# Altium PCB УШЯИ 758725.634.PcbDoc (part 1 of 2)
Units mm, origin at the board's own origin, x right, y up, seen from the top; angles counter-clockwise.
Board outline 220 x 115 mm, 2 copper layers (Top Layer, Top, Bottom Layer, Bottom), stack 1.571 mm thick; 229 components, 122 nets, 707 pads, 215 vias.
Unrouted connection lines stored in the file: 1.
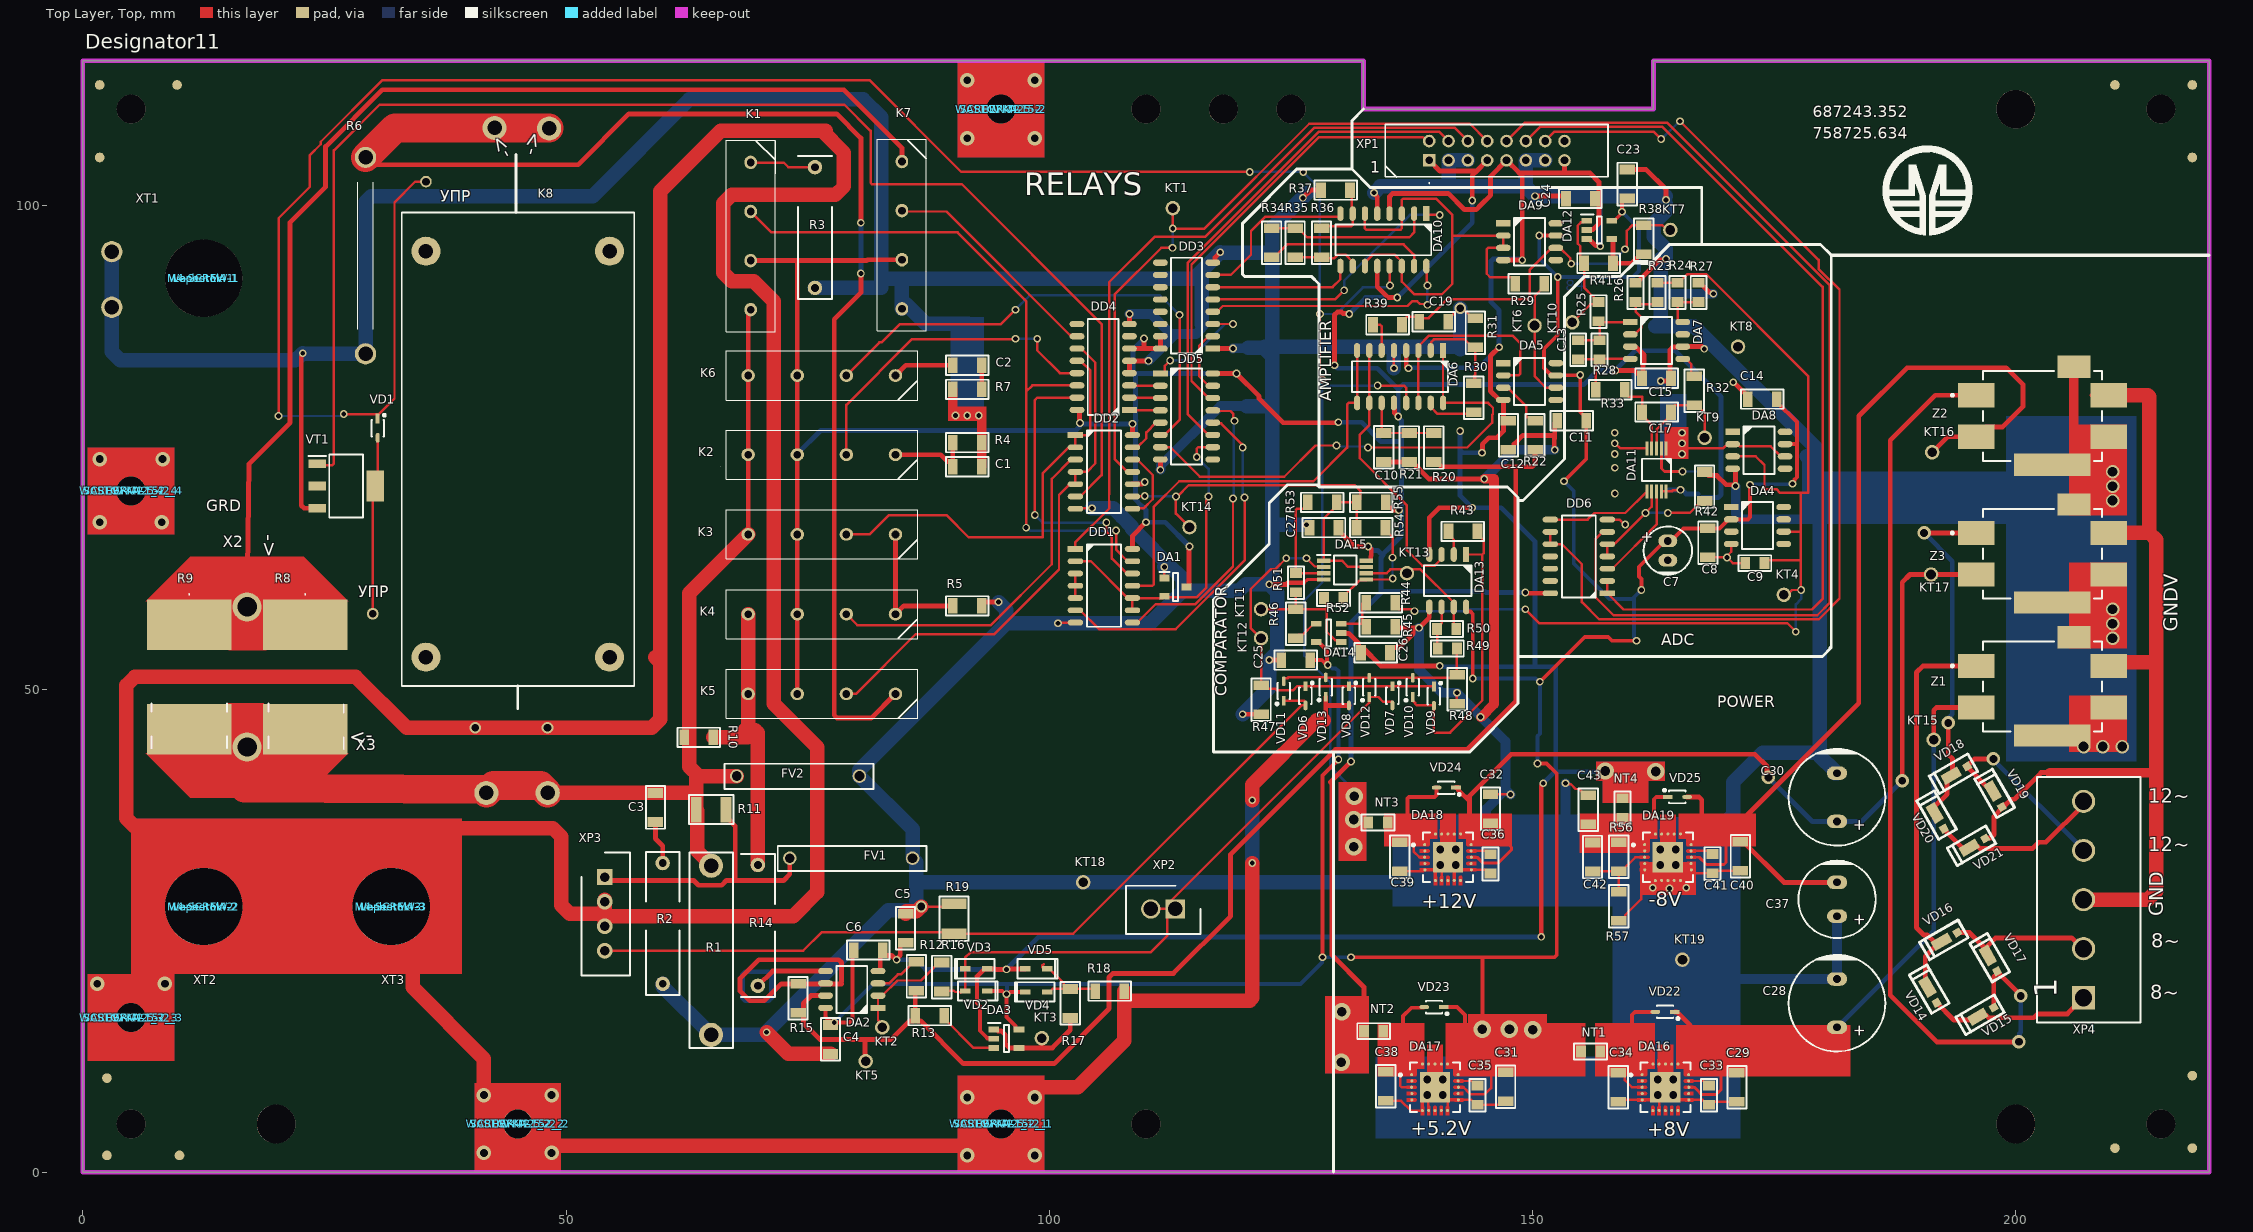
[diagram p0: Top Layer, Top view]
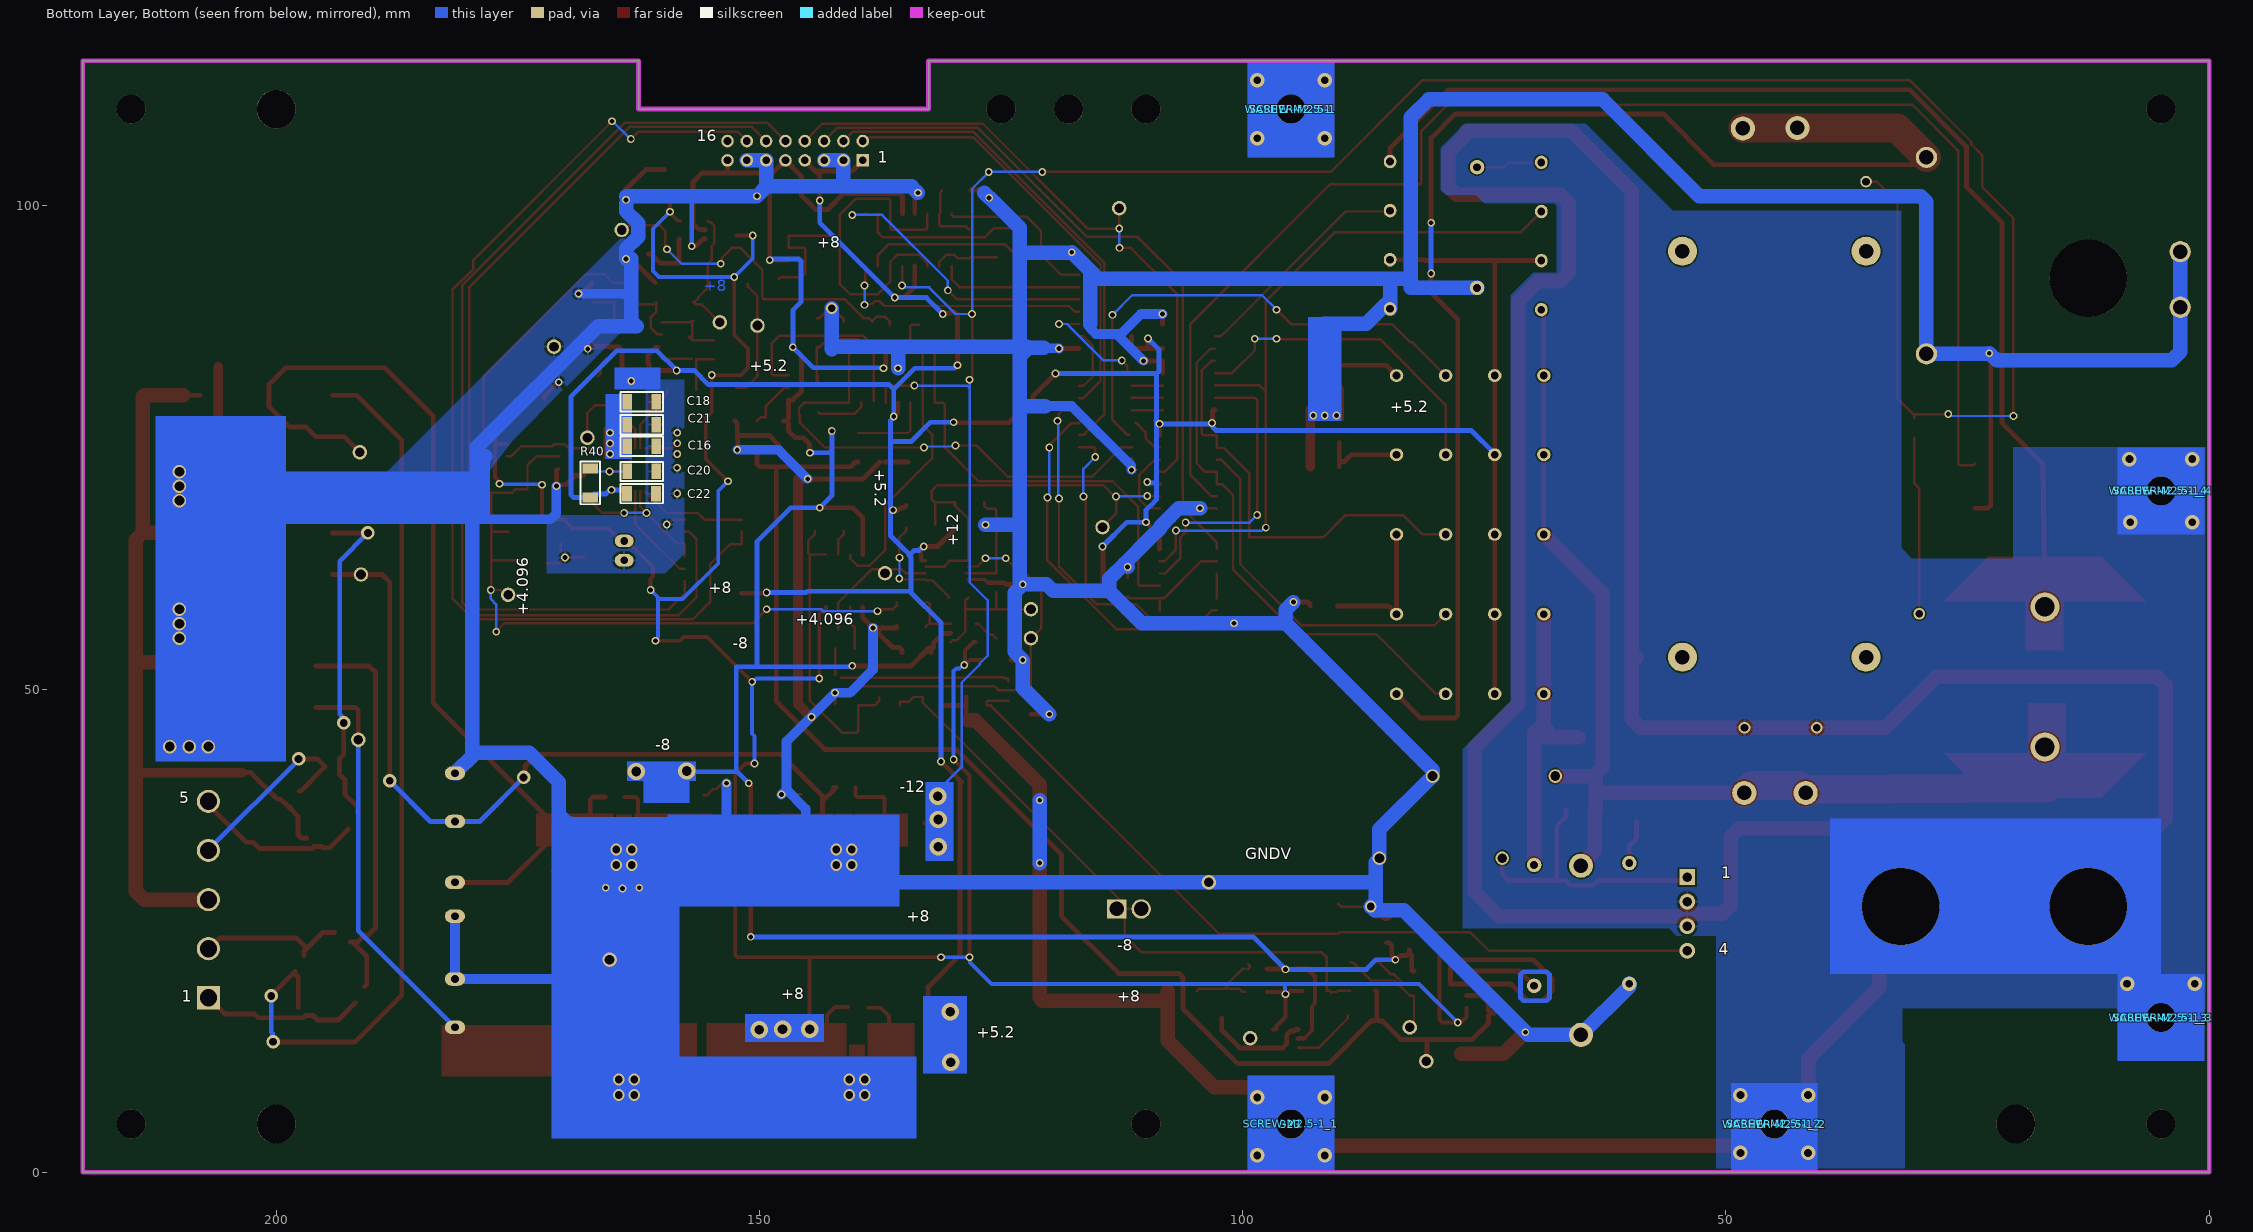
[diagram p1: Bottom Layer, Bottom view, seen from below]
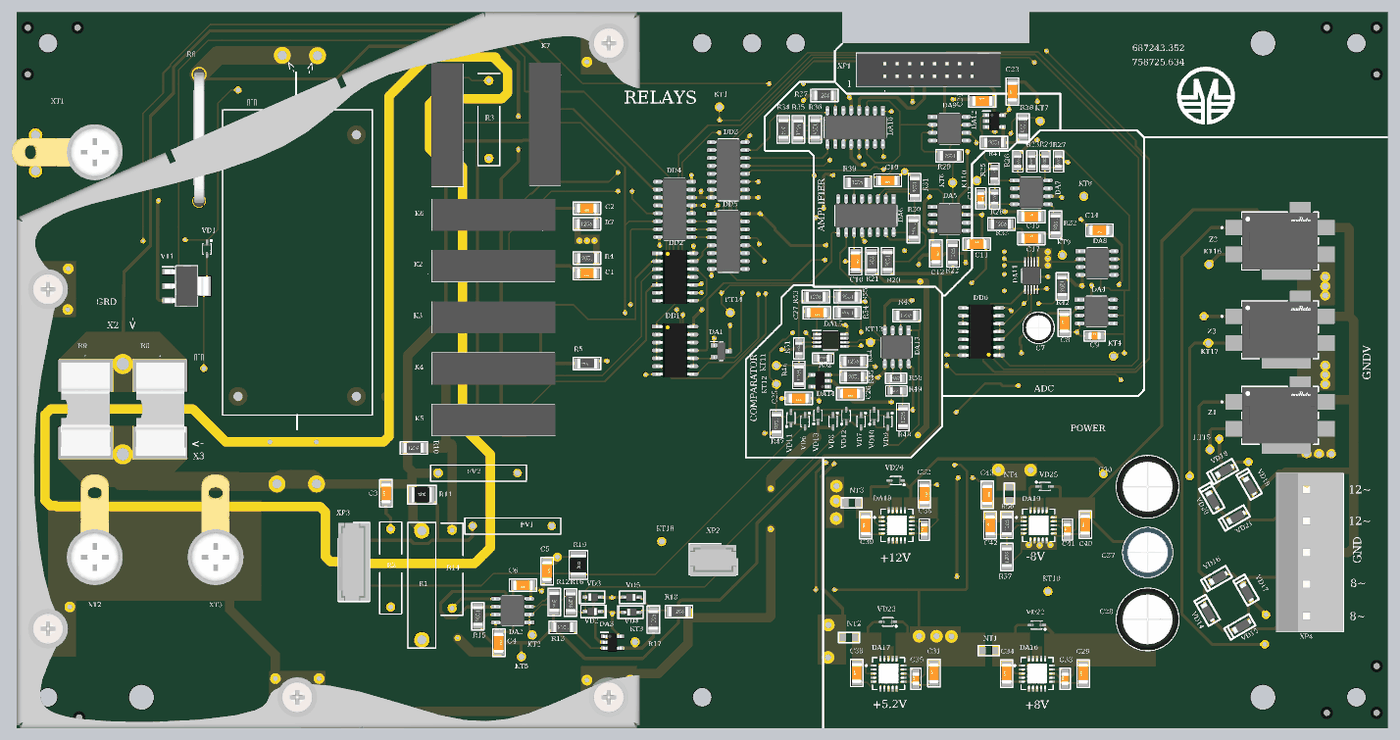
[diagram p3: 3D render of the assembled board from above, using the file's embedded part models]
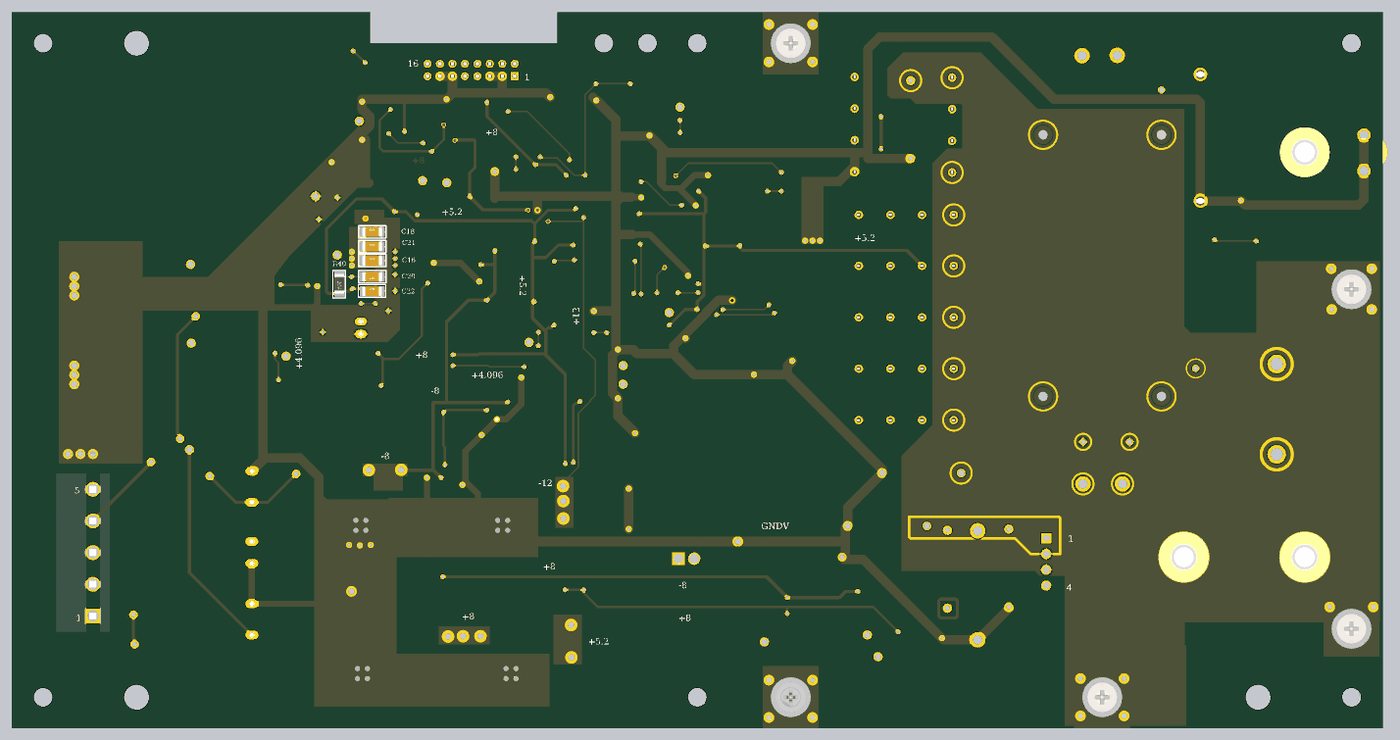
[diagram p4: 3D render of the assembled board from below, using the file's embedded part models]

## Layer stack, top to bottom
Top Solder, Top Mask: solder mask 0.0102, Solder Resist, Dk 3.5
Top Layer, Top: signal copper 0.0356
Dielectric 1: core 1.5, FR-4, Dk 4.8
Bottom Layer, Bottom: signal copper 0.0356
Bottom Solder, Bot Mask: solder mask 0.0102, Solder Resist, Dk 3.5

## Board outline
132.5,110 132.5,115 0,115 0,0 220,0 220,115 162.5,115 162.5,110

## Design rules (kind name [scope] priority, off if disabled: settings)
Clearance [All] p1: gap=0.15 ignorepadtopadclearanceinfootprint=FALSE except(0.2: Arc-Via Track-Via)
HoleSize [All] p1: absolutevalues=TRUE maxlimit=8 minlimit=0.25 maxpercent=80.000 minpercent=20.000
HoleToHoleClearance [All] p1: gap=0.2 allowstackedmicrovias=TRUE
MinimumSolderMaskSliver [All] p1: minsoldermaskwidth=0.001
NetAntennae [All] p1: netantennaetolerance=2
PlaneClearance [All] p1: clearance=0.254
PolygonConnect [All] p1: connectstyle=Relief reliefconductorwidth=0.254 reliefentries=4 polygonreliefangle="90 Angle" airgapwidth=0.254
RoutingVias [All] p1: holewidth=0.5 width=0.8 viastyle="Through Hole" minholewidth=0.5 minwidth=0.8 maxholewidth=0.5 maxwidth=2
ShortCircuit [All] p1: allowed=TRUE
SilkToSilkClearance [All] p1: silktosilkclearance=0.1
SilkToSolderMaskClearance [IsPad] p1: minsilkscreentomaskgap=0.1 clearancetoexposedcopper=TRUE
SolderMaskExpansion [All] p1: expansion=0.102 istentingtop=FALSE
UnConnectedPin [All] p1:
UnRoutedNet [All] p1: checkbadconnections=TRUE
Width [All] p1: maxlimit=5 minlimit=0.15 preferedwidth=0.3 minimp=50.000000 maximp=50.000000 favimp=50.000000
21 further rules are at their usual default settings.

## Classes and differential pairs
component class Switches: C1 C2 C3 C4 C5 C6 DA1 DA2 DA3 DD1 DD2 DD3 DD4 DD5 FV1 FV2 K1 K2 K3 K4 K5 K6 K7 K8 R1 R2 R3 R4 R5 R6 R7 R8 R9 R10 R11 R12 R13 R14 R15 R16 R17 R18 R19 S1 S2 VD1 VD2 VD3 VD4 VD5 VT1 X1 X2 X3 XP1 XP2 XP3 XP? XT1 XT2 XT3
component class PowerSupply: C28 C29 C30 C31 C32 C33 C34 C35 C36 C37 C38 C39 C40 C41 C42 C43 DA16 DA17 DA18 DA19 KT6 KT11 KT13 KT18 KT19 NT1 NT2 NT3 NT4 R56 R57 VD14 VD15 VD16 VD17 VD18 VD19 VD20 VD21 VD22 VD23 VD24 VD25 XP4 Z1 Z2 Z3
component class Comparator: C25 C26 C27 DA13 DA14 DA15 KT6 KT11 KT13 R43 R44 R45 R46 R47 R48 R49 R50 R51 R52 R53 R54 R55 VD6 VD7 VD8 VD9 VD10 VD11 VD12 VD13
component class Amplifier: C7 C8 C9 C10 C11 C12 C13 C14 C15 C16 C17 C18 C19 C20 C21 C22 C23 C24 DA4 DA5 DA6 DA7 DA8 DA9 DA10 DA11 DA12 DD6 KT4 KT5 KT6 R20 R21 R22 R23 R24 R25 R26 R27 R28 R29 R31 R32 R33 R34 R35 R36 R37 R38 R39 R40 R41 R42

## Components (designator, comment, footprint, x,y, rotation, side; value= is the part's Value field where it differs from the comment)
323 "Comment" WASHER-M2.5 95,5 r180 bottom
C1 "1206-XP7-630 B-3,3 нФ+-10%" "CAP: 1206" 91.5,73 r180 top value="3,3 нФ"
C2 "1206-XP7-500 B-15 нФ+-10%" "CAP: 1206" 91.5,83.5 r180 top value="15 нФ"
C3 "1206-NP0-500 B-270 пФ+-5%" "CAP: 1206" 59.25,37.75 r90 top value="22 пФ"
C4 "1206-X7R-50 B-0,1 мкФ+-10%" "CAP: 1206" 77.358,13.75 r270 top value="0,1 мкФ"
C5 "1206-X7R-50 B-0,1 мкФ+-10%" "CAP: 1206" 85.12,25.25 r270 top value="0,1 мкФ"
C6 "1206-X7R-50 B-0,1 мкФ+-10%" "CAP: 1206" 81.25,23 r180 top value="0,1 мкФ"
C7 "JRB-50В-4,7мкФ" "CAP TH ALUM ELEC D5.00mm S2.00mm H11.00mm" 163.991,64.322 r90 top
C8 "1206-X7R-50 B-0,1 мкФ+-10%" "CAP: 1206" 168.135,65.122 r90 top value="0,1 мкФ"
C9 "0805-X7R-25 В-0,1 мкФ +-10%" "CAP: 0805" 172.991,63.022 r0 top value="0,1 мкФ"
C10 "1206-X7R-50 B-0,01 мкФ+-10%" "CAP: 1206" 134.607,75 r270 top value="0,01 мкФ"
C11 "1206-X7R-50 B-0,1 мкФ+-10%" "CAP: 1206" 154.048,77.75 r0 top value="0,1 мкФ"
C12 "1206-X7R-50 B-0,1 мкФ+-10%" "CAP: 1206" 147.5,76.25 r270 top value="0,1 мкФ"
C13 "0805-C0G-50 В-240 пФ +-5%" "CAP: 0805" 154.72,85.102 r270 top value="10 пФ"
C14 "1206-X7R-50 B-0,1 мкФ+-10%" "CAP: 1206" 173.75,80 r180 top value="0,1 мкФ"
C15 "1206-X7R-50 B-0,1 мкФ+-10%" "CAP: 1206" 162.82,82.162 r0 top value="0,1 мкФ"
C16 "1206-X7R-10 B-10 мкФ+-10%" "CAP: 1206" 162.17,75.127 r180 bottom value="10 мкФ"
C17 "1206-X7R-50 B-0,01 мкФ+-10%" "CAP: 1206" 162.82,78.662 r0 top value="0,01 мкФ"
C18 "1206-X7R-50 B-2,2 мкФ+-10%" "CAP: 1206" 162.17,79.722 r180 bottom value="2,2 мкФ"
C19 "1206-X7R-50 B-0,01 мкФ+-10%" "CAP: 1206" 139.784,87.996 r180 top value="0,01 мкФ"
C20 "1206-X7R-50 B-2,2 мкФ+-10%" "CAP: 1206" 162.17,72.511 r0 bottom value="2,2 мкФ"
C21 "1206-X7R-50 B-2,2 мкФ+-10%" "CAP: 1206" 162.17,77.349 r180 bottom value="2,2 мкФ"
C22 "1206-X7R-50 B-0,33 мкФ+-10%" "CAP: 1206" 162.191,70.222 r180 bottom value="0,33 мкФ"
C23 "1206-X7R-50 B-0,1 мкФ+-10%" "CAP: 1206" 159.8,102.25 r90 top value="0,1 мкФ"
C24 "1206-X7R-50 B-0,1 мкФ+-10%" "CAP: 1206" 154.947,100.75 r0 top value="0,1 мкФ"
C25 "1206-X7R-50 B-0,1 мкФ+-10%" "CAP: 1206" 125.5,53 r180 top value="0,1 мкФ"
C26 "1206-X7R-50 B-0,1 мкФ+-10%" "CAP: 1206" 133.75,53.75 r180 top value="0,1 мкФ"
C27 "1206-X7R-50 B-0,1 мкФ+-10%" "CAP: 1206" 128.412,66.709 r180 top value="0,1 мкФ"
C28 "JRB-25В-1000 мкФ" "CAP TH ALUM ELEC D10.00mm S5.00mm H21.00mm" 181.493,17.5 r270 top
C29 "1206-X7R-50 B-10 мкФ+-10%" "CAP: 1206" 171.143,8.8 r90 top value="10 мкФ"
C30 "JRB-35В-470мкФ" "CAP TH ALUM ELEC D10.00mm S5.00mm H17.00mm" 181.493,38.8 r270 top
C31 "1206-X7R-50 B-10 мкФ+-10%" "CAP: 1206" 147.2,8.867 r90 top value="10 мкФ"
C32 "1206-X7R-50 B-10 мкФ+-10%" "CAP: 1206" 145.643,37.6 r270 top value="10 мкФ"
C33 "0805-X7R-25 В-1 мкФ +-10%" "CAP: 0805" 168.243,7.975 r90 top value="1 мкФ"
C34 "1206-X7R-25 B-47мкФ+-10%" "CAP: 1206" 158.86,8.8 r90 top value="51 пФ"
C35 "0805-X7R-25 В-1 мкФ +-10%" "CAP: 0805" 144.3,7.975 r90 top value="1 мкФ"
C36 "0805-X7R-25 В-1 мкФ +-10%" "CAP: 0805" 145.643,31.915 r90 top value="1 мкФ"
C37 "JRB-25В-220мкФ" "CAP TH ALPOLY D8.00mm S3.50mm H12.00mm" 181.5,28.25 r270 top
C38 "1206-X7R-25 B-47мкФ+-10%" "CAP: 1206" 134.8,8.899 r90 top value="51 пФ"
C39 "1206-X7R-25 B-47мкФ+-10%" "CAP: 1206" 136.243,32.635 r90 top value="51 пФ"
C40 "1206-X7R-50 B-10 мкФ+-10%" "CAP: 1206" 171.5,32.711 r90 top value="10 мкФ"
C41 "0805-X7R-25 В-1 мкФ +-10%" "CAP: 0805" 168.6,31.933 r90 top value="1 мкФ"
C42 "1206-X7R-50 B-0,01 мкФ+-10%" "CAP: 1206" 156.2,32.625 r90 top value="0,01 мкФ"
C43 "1206-X7R-25 B-47мкФ+-10%" "CAP: 1206" 155.75,37.5 r270 top value="51 пФ"
DA1 "MAX809S" SOT-23-3 111.9,61.5 r0 top
DA2 "TLV9152IDR" 8-SOIC 79.562,18.915 r180 top
DA3 "TLV9151IDR" SOT-23-5 95.565,13.827 r0 top
DA4 "ADR434BR" 8-SOIC 173.266,66.922 r0 top
DA5 "ADA4637-1ARZ" 8-SOIC 149.687,81.817 r0 top
DA6 "ADG433BR" 16-SOIC 136.284,82.317 r270 top
DA7 "ADA4941-1YRZ" 8-SOIC 162.82,86.062 r0 top
DA8 "AD8031BRZ" 8-SOIC 173.408,74.707 r0 top
DA9 "ADA4637-1ARZ" 8-SOIC 149.687,96.28 r0 top
DA10 "ADG431BR" 16-SOIC 134.559,96.48 r270 top
DA11 "AD7691BRM" 10-MSOP 162.82,72.677 r270 top
DA12 "TLV9151IDR" SOT-23-5 156.9,97.5 r0 top
DA13 "TLV9152IDR" 8-SOIC 141.212,61.209 r270 top
DA14 "TLV9151IDR" SOT-23-5 128.912,55.809 r180 top
DA15 "TLV1842" 8-VSSOP 130.612,62.309 r0 top
DA16 "TPS7A4701" 20-VQFN 163.743,8.8 r0 top
DA17 "TPS7A4701" 20-VQFN 139.9,8.8 r0 top
DA18 "TPS7A4701" 20-VQFN 141.243,32.6 r0 top
DA19 "TPS7A3301" 20-VQFN 164,32.6 r0 top
DD1 "IN74HC00AD" 14-soic 102.7,64.497 r0 top
DD2 "IN74HC08AD" 14-SOIC 102.7,76.279 r0 top
DD3 "IN74HC139AD" 16-SOIC 114.2,89.674 r180 top
DD4 "IN74HC138AD" 16-SOIC 105.575,83.323 r180 top
DD5 "IN74HC595AD" 16-SOIC 114.2,78.2 r0 top
DD6 "IN74HC08AD" 14-SOIC 157.735,59.912 r180 top
Designator11 "Comment" Ekran 95,5 r90 top
FV1 "2027-09-B19" 2027-09-B19 79.5,32.5 r180 top
FV2 "2027-09-B19" 2027-09-B19 74,41 r180 top
K1 "SIL05-1A72-71L" SIL051A7271L 69.1,104.49 r270 top
K2 "SIL05-1A72-71L" SIL051A7271L 84.08,74.25 r180 top
K3 "SIL05-1A72-71L" SIL051A7271L 84.08,66 r180 top
K4 "SIL05-1A72-71L" SIL051A7271L 84.08,57.75 r180 top
K5 "SIL05-1A72-71L" SIL051A7271L 84.08,49.5 r180 top
K6 "SIL05-1A72-71L" SIL051A7271L 84.08,82.438 r180 top
K7 "SIL05-1A72-71L" SIL051A7271L 84.75,104.58 r270 top
K8 "УШЯИ.685442.092vs2Rel" УШЯИ.685442.092vs2Rel 45,50.3 r90 top
KT1 "OTV10" OTV10 112.769,99.75 r0 top
KT2 "OTV10" OTV10 82.711,15 r0 top
KT3 "OTV10" OTV10 99.222,13.877 r0 top
KT4 "OTV10" OTV10 176,59.75 r0 top
KT5 "OTV10" OTV10 81,11.5 r0 top
KT6 "OTV10" OTV10 150.2,87.608 r0 top
KT7 "OTV10" OTV10 164.25,97.5 r0 top
KT8 "OTV10" OTV10 171.25,85.427 r0 top
KT9 "OTV10" OTV10 167.791,76 r0 top
KT10 "OTV10" OTV10 154.095,87.936 r0 top
KT11 "OTV10" OTV10 121.904,58.259 r0 top
KT12 "OTV10" OTV10 121.904,55.259 r0 top
KT13 "OTV10" OTV10 137,61.984 r0 top
KT14 "OTV10" OTV10 114.5,66.75 r0 top
KT15 "OTV10" OTV10 191.5,44.75 r0 top
KT16 "OTV10" OTV10 191.336,74.5 r0 top
KT17 "OTV10" OTV10 191.22,61.85 r0 top
KT18 "OTV10" OTV10 103.5,30 r0 top
KT19 "OTV10" OTV10 165.5,22 r0 top
Lepestok-1 "Comment" Lepestok 12.5,92.5 r180 top locked
Lepestok-2 "Comment" Lepestok 12.5,27.5 r90 top locked
Lepestok-3 "Comment" Lepestok 31.9,27.5 r90 top locked
M4-SCREW-1 "Comment" M4-10SCREW 12.5,92.5 r0 top
M4-SCREW-2 "Comment" M4-10SCREW 12.5,27.5 r0 top
M4-SCREW-3 "Comment" M4-10SCREW 31.9,27.5 r0 top
NT1 "NetTie" NetTie 157,12.5 r180 top net-tie
NT2 "NetTie" NetTie 134.557,14.6 r180 top net-tie
NT3 "NetTie" NetTie 135,36.2 r180 top net-tie
NT4 "NetTie" NetTie 159.3,36.7 r90 top net-tie
R1 "С2-29В-0,25-4,99 МОм +-0.1%" С2-29В-0,25(140.02.0204.00.00) 65,22.97 r90 top
R2 "С2-29В-0,125-22 Ом +-0.1%-1,0-А" С2-29В-0,125(140.02.0202.00.00) 60,25.75 r90 top
R3 "С2-29В-0,125-49,9 кОм +-0.1%-1,0-А" С2-29В-0,125(140.02.0202.00.00) 75.75,97.75 r90 top
R4 "1206-499 Ом+-0,1%" 1206 91.5,75.5 r180 top value="499 Ом"
R5 "1206-4,99 Ом+-0,1%" 1206 91.5,58.6 r180 top value="4,99 Ом"
R6 "OAR5-R050FLF" OAR5 29.25,84.68 r90 top value="0.05 Ом"
R7 "1206-27 Ом+-5%" 1206 91.5,81 r0 top value="27 Ом"
R8 "WSL5931L5000FEA" WSL5931L5000FEA 23,51.25 r270 top value="0,5 миллиОм"
R9 "WSL5931L5000FEA" WSL5931L5000FEA 11,51.25 r270 top value="0,5 миллиОм"
R10 "1206-91 кОм+-5%" 1206 63.717,45 r0 top value="91 кОм"
R11 "1210-100 Ом+-5%" 1210 65,37.517 r0 top value="100 Ом"
R12 "1206-470 Ом+-5%" 1206 86.25,20.28 r270 top value="470 Ом"
R13 "1206-470 Ом+-5%" 1206 87.627,16.217 r180 top value="470 Ом"
R14 "С2-29В-0,125-332 кОм+-0.1%-1,0-А" С2-29В-0,125(140.02.0202.00.00) 69.85,25.55 r90 top
R15 "1206-470 Ом+-5%" 1206 74,18 r270 top value="470 Ом"
R16 "1206-51 Ом+-5%" 1206 88.868,20.207 r270 top value="51 Ом"
R17 "1206-22 Ом+-5%" 1206 102.165,17.474 r90 top value="22 Ом"
R18 "1206-22 Ом+-5%" 1206 106.25,18.75 r0 top value="22 Ом"
R19 "1210-1,1 кОм+-5%" 1210 90.121,26.25 r270 top value="1,1 кОм"
R20 "1206-5,1 кОм+-5%" 1206 139.765,74.992 r270 top value="5,1 кОм"
R21 "1206-20 кОм+-5%" 1206 137.232,74.992 r90 top value="20 кОм"
R22 "1206-470 Ом+-5%" 1206 150.25,76.25 r90 top value="470 Ом"
R23 "0805-1 кОм+-0,1%" 0805 162.903,91.042 r270 top value="1 кОм"
R24 "0805-1 кОм+-0,1%" 0805 165.003,91.042 r270 top value="1 кОм"
R25 "0805-1 кОм+-0,1%" 0805 156.82,89.042 r270 top value="1 кОм"
R26 "0805-1 кОм+-0,1%" 0805 160.654,91.042 r90 top value="1 кОм"
R27 "0805-332 Ом+-0,1%" 0805 167.182,91.042 r270 top value="332 Ом"
R28 "0805-1 кОм+-0,1%" 0805 156.92,85.102 r270 top value="1 кОм"
R29 "1206-470 Ом+-5%" 1206 149.687,91.922 r180 top value="470 Ом"
R30 "1206-9,09 кОм+-1%" 1206 143.903,80.142 r270 top value="9,09 кОм"
R31 "1206-1 кОм+-1%" 1206 144.084,86.872 r270 top value="1 кОм"
R32 "1206-51 Ом+-5%" 1206 166.72,80.862 r270 top value="51 Ом"
R33 "1206-51 Ом+-5%" 1206 158.02,80.962 r0 top value="51 Ом"
R34 "1206-4,02 кОм+-0,1%" 1206 122.991,96.186 r270 top value="4,02 кОм"
R35 "1206-2 кОм+-0.1%" 1206 125.428,96.186 r90 top value="2 кОм"
R36 "1206-1 кОм+-0.1%" 1206 128.159,96.18 r270 top value="1 кОм"
R37 "1206-1 кОм+-0.1%" 1206 129.614,101.622 r0 top value="1 кОм"
R38 "1206-1 кОм+-0.1%" 1206 161.5,96.5 r270 top value="1 кОм"
R39 "1206-5,1 кОм+-5%" 1206 134.99,87.696 r0 top value="5,1 кОм"
R40 "1206-10 Ом+-5%" 1206 167.491,71.322 r270 bottom value="10 Ом"
R41 "1206-1,82 кОм+-0,1%" 1206 156.82,94.05 r180 top value="1,82 кОм"
R42 "1206-10 кОм+-5%" 1206 167.791,70.952 r270 top value="10 кОм"
R43 "1206-470 Ом+-5%" 1206 142.792,66.307 r0 top value="470 Ом"
R44 "1206-7,15 кОм+-1%" 1206 134.3,58.934 r0 top value="7,15 кОм"
R45 "1206-10 кОм+-0,5%" 1206 134.3,56.459 r180 top value="10 кОм"
R46 "1206-470 Ом+-5%" 1206 125.5,56.759 r90 top value="470 Ом"
R47 "1206-2,4 кОм+-5%" 1206 121.904,48.909 r270 top value="2,4 кОм"
R48 "1206-2,4 кОм+-5%" 1206 142.204,49.996 r90 top value="2,4 кОм"
R49 "0805-1 кОм+-0,1%" 0805 141.172,54.204 r180 top value="1 кОм"
R50 "0805-1 кОм+-0,1%" 0805 141.112,56.209 r0 top value="1 кОм"
R51 "0805-1 кОм+-0,1%" 0805 125.5,61 r90 top value="1 кОм"
R52 "0805-1 кОм+-0,1%" 0805 129.412,59.435 r180 top value="1 кОм"
R53 "1206-510 кОм+-1%" 1206 128.25,69.309 r0 top value="510 кОм"
R54 "1206-510 кОм+-1%" 1206 133.287,66.709 r180 top value="510 кОм"
R55 "1206-4,7 кОм+-5%" 1206 133.312,69.309 r180 top value="4,7 кОм"
R56 "1206-1,24 МОм+-1%" 1206 158.9,32.66 r90 top value="1,24 МОм"
R57 "1206-221 кОм+-1%" 1206 158.9,27.525 r90 top value="221 кОм"
SCREW-M2.5-1 "Comment" SCREW-M2.5 95,110 r180 bottom
SCREW-M2.5-1_1 "Comment" SCREW-M2.5 95,5 r180 bottom
SCREW-M2.5-1_2 "Comment" SCREW-M2.5 45,5 r180 bottom
SCREW-M2.5-1_3 "Comment" SCREW-M2.5 5,16 r180 bottom
SCREW-M2.5-1_4 "Comment" SCREW-M2.5 5,70.5 r180 bottom
SCREW-M2.5-2 "Comment" SCREW-M2.5 95,110 r0 top
SCREW-M2.5-2_1 "Comment" SCREW-M2.5 95,5 r0 top
SCREW-M2.5-2_2 "Comment" SCREW-M2.5 45,5 r0 top
SCREW-M2.5-2_3 "Comment" SCREW-M2.5 5,16 r0 top
SCREW-M2.5-2_4 "Comment" SCREW-M2.5 5,70.5 r0 top
STOYKA-1 "Comment" STOYKA 95,110 r0 top
STOYKA-1_1 "Comment" STOYKA 95,5 r0 top
STOYKA-1_2 "Comment" STOYKA 45,5 r0 top
STOYKA-1_3 "Comment" STOYKA 5,16 r0 top
STOYKA-1_4 "Comment" STOYKA 5,70.5 r0 top
VD1 "1N4148WS" SOD-323F 30.5,77 r270 top
VD2 "1N4007WS" SOD-323 92.429,18.764 r180 top
VD3 "1N4007WS" SOD-323 92.429,21.064 r0 top
VD4 "1N4007WS" SOD-323 98.625,18.666 r0 top
VD5 "1N4007WS" SOD-323 98.625,21.054 r180 top
VD6 "1N4148WS" SOD-323F 126.5,49.303 r270 top
VD7 "1N4148WS" SOD-323F 135.5,49.303 r270 top
VD8 "1N4148WS" SOD-323F 131,49.303 r270 top
VD9 "1N4148WS" SOD-323F 139.788,49.27 r270 top
VD10 "1N4148WS" SOD-323F 137.588,50.17 r90 top
VD11 "1N4148WS" SOD-323F 124.25,49.8 r90 top
VD12 "1N4148WS" SOD-323F 133.1,50.176 r90 top
VD13 "1N4148WS" SOD-323F 128.6,50.203 r90 top
VD14 "V1P22" DO-219AD 191.25,18.5 r300 top
VD15 "V1P22" DO-219AD 196.75,16.5 r30 top
VD16 "V1P22" DO-219AD 193,24.25 r30 top
VD17 "V1P22" DO-219AD 197.5,21.75 r300 top
VD18 "V1P22" DO-219AD 194,41.446 r30 top
VD19 "V1P22" DO-219AD 198,38.75 r300 top
VD20 "V1P22" DO-219AD 192,36.5 r300 top
VD21 "V1P22" DO-219AD 195.87,33.988 r30 top
VD22 "1N4148WS" SOD-323F 163.7,16.6 r180 top
VD23 "1N4148WS" SOD-323F 139.8,17.1 r180 top
VD24 "1N4148WS" SOD-323F 141.068,39.8 r180 top
VD25 "1N4148WS" SOD-323F 164.983,38.836 r0 top
VT1 "FZT658" SOT-23-4 24.25,73.3 r180 top
WASHER-M2.5-1 "Comment" WASHER-M2.5 95,110 r180 bottom
WASHER-M2.5-1_2 "Comment" WASHER-M2.5 45,5 r180 bottom
WASHER-M2.5-1_3 "Comment" WASHER-M2.5 5,16 r180 bottom
WASHER-M2.5-1_4 "Comment" WASHER-M2.5 5,70.5 r180 bottom
WASHER-M2.5-2 "Comment" WASHER-M2.5 95,110 r0 top
WASHER-M2.5-2_1 "Comment" WASHER-M2.5 95,5 r0 top
WASHER-M2.5-2_2 "Comment" WASHER-M2.5 45,5 r0 top
WASHER-M2.5-2_3 "Comment" WASHER-M2.5 5,16 r0 top
WASHER-M2.5-2_4 "Comment" WASHER-M2.5 5,70.5 r0 top
WasherM4-1 "Comment" "WASHER M4" 12.5,92.5 r0 top
WasherM4-2 "Comment" "WASHER M4" 12.5,27.5 r0 top
WasherM4-3 "Comment" "WASHER M4" 31.9,27.5 r0 top
XP1 "DS1014-16SF1B" DS1014-16S 139.3,104.7 r0 top
XP2 "280370-2" 280370-2 113.04,27.25 r180 top
XP3 "280371-2" 280371-2 54,30.54 r270 top
XP4 "DS1074-5MVT6" DS1074-5MV 207,18.06 r90 top
XT1 "УШЯИ.685631.123" УШЯИ.685631.123 12.5,92.5 r0 top locked
XT2 "УШЯИ.685631.123" УШЯИ.685631.123 12.5,27.5 r0 top locked
XT3 "УШЯИ.685631.123" УШЯИ.685631.123 31.9,27.5 r0 top
Z1 "BNX022-01" BNX02 202.75,50.25 r0 top
Z2 "BNX022-01" BNX02 202.75,78.25 r0 top
Z3 "BNX022-01" BNX02 202.75,64 r0 top

## Footprints (in the part's own frame and the unit in brackets; to place one, negate y for a bottom-side part, rotate by r counter-clockwise, add the part's x,y. Pads: shape width x height; smd on the part's side, far side on the other; paste and mask are expansions set on the pad)
8-SOIC [mm] "Body 3.9mmx4.9mm 1.27 pitch"
  rect 1.525x0.65 smd: 1(-2.712,1.905)
  oval 1.525x0.65 smd: 2(-2.712,0.635) 3(-2.712,-0.635) 4(-2.712,-1.905) 5(2.712,-1.905) 6(2.712,-0.635) 7(2.712,0.635) 8(2.712,1.905)
  silkscreen extent -1.6,-2.45 1.6,2.45, body extent -3,-2.45 3,2.45, height 1.75
8-VSSOP [mm]
  rect 1.4x0.45 smd: 1(-2.2,0.975) 2(-2.2,0.325) 3(-2.2,-0.325) 4(-2.2,-0.975) 5(2.2,-0.975) 6(2.2,-0.325) 7(2.2,0.325) 8(2.2,0.975)
  silkscreen extent -2.9,-1.5 1.15,1.55, body extent -2.45,-1.5 2.45,1.5, height 1.1
10-MSOP [mm] "3x3 mm, pitch 0.5 mm"
  rect 1.45x0.3 smd: 1(-2.225,1) 2(-2.225,0.5) 3(-2.225,0) 4(-2.225,-0.5) 5(-2.225,-1) 6(2.225,-1) 7(2.225,-0.5) 8(2.225,0) 9(2.225,0.5) 10(2.225,1)
  silkscreen extent -1.15,-1.5 1.15,1.5, body extent -2.45,-1.5 2.45,1.5, height 0.95
14-soic [mm] "Body 8.6x3.9mm, pitch 1.27 mm"
  rect 1.6x0.6 smd: 1(0,0)
  rrect100% 1.6x0.6 smd: 2(0,-1.27) 3(0,-2.54) 4(0,-3.81) 5(0,-5.08) 6(0,-6.35) 7(0,-7.62) 8(5.9,-7.62) 9(5.9,-6.35) 10(5.9,-5.08) 11(5.9,-3.81) 12(5.9,-2.54) 13(5.9,-1.27) 14(5.9,0)
  round 0.5 on Mech13: ""(0.5,0)
  silkscreen extent 1.2,-8.05 4.7,0.45, body extent -0.12,-8.15 6.02,0.55, height 1.78
14-SOIC [mm] "Body 8.6x3.9mm, pitch 1.27 mm"
  rect 1.6x0.6 smd: 1(0,0)
  rrect100% 1.6x0.6 smd: 2(0,-1.27) 3(0,-2.54) 4(0,-3.81) 5(0,-5.08) 6(0,-6.35) 7(0,-7.62) 8(5.9,-7.62) 9(5.9,-6.35) 10(5.9,-5.08) 11(5.9,-3.81) 12(5.9,-2.54) 13(5.9,-1.27) 14(5.9,0)
  round 0.5 on Mech13: ""(0.5,0)
  silkscreen extent 1.2,-8.05 4.7,0.45, body extent -0.12,-8.15 6.02,0.55, height 1.78
16-SOIC [mm] "Body 3.9mm×9.9mm 1.27 pitch"
  rect 1.525x0.65 smd: 1(-2.712,4.445)
  oval 1.525x0.65 smd: 2(-2.712,3.175) 3(-2.712,1.905) 4(-2.712,0.635) 5(-2.712,-0.635) 6(-2.712,-1.905) 7(-2.712,-3.175) 8(-2.712,-4.445) 9(2.712,-4.445) 10(2.712,-3.175) 11(2.712,-1.905) 12(2.712,-0.635) 13(2.712,0.635) 14(2.712,1.905) 15(2.712,3.175) 16(2.712,4.445)
  silkscreen extent -1.6,-4.95 1.6,4.95, body extent -3,-4.95 3,4.95, height 1.75
20-VQFN [mm]
  round 0.315 smd paste-1000 mask+0: 1(-2.418,1.3) 2(-2.4,0.65) 3(-2.418,0) 4(-2.4,-0.65) 5(-2.4,-1.3) 6(-1.3,-2.418) 7(-0.65,-2.4) 8(0,-2.418) 9(0.65,-2.4) 10(1.3,-2.4) 11(2.418,-1.3) 12(2.4,-0.65) 13(2.418,0) 14(2.4,0.65) 15(2.4,1.3) 16(1.3,2.418) 17(0.65,2.4) 18(0,2.418) 19(-0.65,2.4) 20(-1.3,2.4)
  rect 3.15x3.15 smd paste-1000 mask+0: 21(0,0)
  Top Layer, Top region: -1.125,2.9 -1.125,2.075 -1.148,1.987 -1.212,1.923 -1.3,1.9 -1.3,1.9 -1.367,1.913 -1.424,1.951 -1.462,2.008 -1.475,2.075 -1.475,2.075 -1.475,2.9
  Top Layer, Top region: -0.475,2.9 -0.475,2.075 -0.498,1.987 -0.563,1.923 -0.65,1.9 -0.65,1.9 -0.717,1.913 -0.774,1.951 -0.812,2.008 -0.825,2.075 -0.825,2.075 -0.825,2.9
  Top Layer, Top region: 0.175,2.9 0.175,2.075 0.152,1.987 0.088,1.923 0,1.9 0,1.9 -0.067,1.913 -0.124,1.951 -0.162,2.008 -0.175,2.075 -0.175,2.075 -0.175,2.9
  Top Layer, Top region: 0.825,2.9 0.825,2.075 0.802,1.987 0.738,1.923 0.65,1.9 0.65,1.9 0.583,1.913 0.526,1.951 0.488,2.008 0.475,2.075 0.475,2.075 0.475,2.9
  Top Layer, Top region: 1.475,2.9 1.475,2.075 1.452,1.987 1.388,1.923 1.3,1.9 1.3,1.9 1.233,1.913 1.176,1.951 1.138,2.008 1.125,2.075 1.125,2.075 1.125,2.9
  Top Layer, Top region: 1.125,-2.9 1.125,-2.075 1.138,-2.008 1.176,-1.951 1.233,-1.913 1.3,-1.9 1.3,-1.9 1.367,-1.913 1.424,-1.951 1.462,-2.008 1.475,-2.075 1.475,-2.075 1.475,-2.9
  Top Layer, Top region: 0.475,-2.9 0.475,-2.075 0.488,-2.008 0.526,-1.951 0.583,-1.913 0.65,-1.9 0.65,-1.9 0.717,-1.913 0.774,-1.951 0.812,-2.008 0.825,-2.075 0.825,-2.075 0.825,-2.9
  Top Layer, Top region: -0.175,-2.9 -0.175,-2.075 -0.162,-2.008 -0.124,-1.951 -0.067,-1.913 0,-1.9 0,-1.9 0.067,-1.913 0.124,-1.951 0.162,-2.008 0.175,-2.075 0.175,-2.075 0.175,-2.9
  Top Layer, Top region: -0.825,-2.9 -0.825,-2.075 -0.812,-2.008 -0.774,-1.951 -0.717,-1.913 -0.65,-1.9 -0.65,-1.9 -0.583,-1.913 -0.526,-1.951 -0.488,-2.008 -0.475,-2.075 -0.475,-2.075 -0.475,-2.9
  Top Layer, Top region: -1.475,-2.9 -1.475,-2.075 -1.462,-2.008 -1.424,-1.951 -1.367,-1.913 -1.3,-1.9 -1.3,-1.9 -1.233,-1.913 -1.176,-1.951 -1.138,-2.008 -1.125,-2.075 -1.125,-2.075 -1.125,-2.9
  Top Layer, Top region: 2.9,1.125 2.075,1.125 2.008,1.138 1.951,1.176 1.913,1.233 1.9,1.3 1.9,1.3 1.913,1.367 1.951,1.424 2.008,1.462 2.075,1.475 2.075,1.475 2.9,1.475
  Top Layer, Top region: 2.9,0.475 2.075,0.475 2.008,0.488 1.951,0.526 1.913,0.583 1.9,0.65 1.9,0.65 1.913,0.717 1.951,0.774 2.008,0.812 2.075,0.825 2.075,0.825 2.9,0.825
  Top Layer, Top region: 2.9,-0.175 2.075,-0.175 2.008,-0.162 1.951,-0.124 1.913,-0.067 1.9,0 1.9,0 1.913,0.067 1.951,0.124 2.008,0.162 2.075,0.175 2.075,0.175 2.9,0.175
  Top Layer, Top region: 2.9,-0.825 2.075,-0.825 2.008,-0.812 1.951,-0.774 1.913,-0.717 1.9,-0.65 1.9,-0.65 1.913,-0.583 1.951,-0.526 2.008,-0.488 2.075,-0.475 2.075,-0.475 2.9,-0.475
  Top Layer, Top region: 2.9,-1.475 2.075,-1.475 2.008,-1.462 1.951,-1.424 1.913,-1.367 1.9,-1.3 1.9,-1.3 1.913,-1.233 1.951,-1.176 2.008,-1.138 2.075,-1.125 2.075,-1.125 2.9,-1.125
  Top Layer, Top region: -2.9,-1.125 -2.075,-1.125 -2.008,-1.138 -1.951,-1.176 -1.913,-1.233 -1.9,-1.3 -1.9,-1.3 -1.923,-1.388 -1.987,-1.452 -2.075,-1.475 -2.075,-1.475 -2.9,-1.475
  Top Layer, Top region: -2.9,-0.475 -2.075,-0.475 -2.008,-0.488 -1.951,-0.526 -1.913,-0.583 -1.9,-0.65 -1.9,-0.65 -1.923,-0.738 -1.987,-0.802 -2.075,-0.825 -2.075,-0.825 -2.9,-0.825
  Top Layer, Top region: -2.9,0.175 -2.075,0.175 -2.008,0.162 -1.951,0.124 -1.913,0.067 -1.9,0 -1.9,0 -1.923,-0.088 -1.987,-0.152 -2.075,-0.175 -2.075,-0.175 -2.9,-0.175
  Top Layer, Top region: -2.9,0.825 -2.075,0.825 -2.008,0.812 -1.951,0.774 -1.913,0.717 -1.9,0.65 -1.9,0.65 -1.923,0.563 -1.987,0.498 -2.075,0.475 -2.075,0.475 -2.9,0.475
  Top Layer, Top region: -2.9,1.475 -2.075,1.475 -2.008,1.462 -1.951,1.424 -1.913,1.367 -1.9,1.3 -1.9,1.3 -1.923,1.212 -1.987,1.148 -2.075,1.125 -2.075,1.125 -2.9,1.125
  silkscreen extent -3.7,-2.58 2.58,2.58, body extent -3,-3 3,3, height 0.25
0805 [mm] "Resistor SMD"
  rect 1x1.25 smd: 1(-1,0) 2(1,0)
  silkscreen extent -1.7,-0.83 1.7,0.83, body extent -1,-0.6 1,0.6, height 0.44
1206 [mm] "Resistor SMD"
  rect 1x1.6 smd: 1(-1.5,0) 2(1.5,0)
  silkscreen extent -2.2,-1 2.2,1, body extent -1.65,-0.8 1.55,0.8, height 0.47
1210 [mm] "Resistor SMD"
  rect 1.1x2.6 smd: 1(-1.55,0) 2(1.55,0)
  silkscreen extent -2.3,-1.5 2.3,1.5, body extent -1.6,-1.25 1.6,1.25, height 0.6
2027-09-B19 [mm]
  round 1.4 hole 1: 1(-6.35,0) 2(6.35,0)
  silkscreen extent -7.8,-1.27 7.6,1.33, body extent -3,-4 3,4, height 10
280370-2 [mm] "AMPMODU 2"
  rect 2x2 hole 1.5: 1(0,0)
  round 2 hole 1.5: 2(2.54,0)
  silkscreen extent -2.58,-2.4 5.12,2.6, body extent -2.41,-2.2 4.95,2.8, height 12.6
280371-2 [mm] "AMPMODU 2"
  rect 1.65x1.65 hole 1: 1(0,0)
  round 1.65 hole 1: 2(2.54,0) 3(5.08,0) 4(7.62,0)
  silkscreen extent -2.54,-2.4 10.16,2.6, body extent -2.41,-2.4 10.03,2.6, height 12.6
BNX02 [mm]
  rect 3.8x2.5 smd paste+0 mask+0: 1(-6.85,2.15) 2(6.85,2.15) 3(-6.85,-2.15) 4(6.85,-2.15)
  rect 7.9x2.3 smd paste+0 mask+0: 4(1,-5.05)
  rect 3.4x2.3 smd paste+0 mask+0: 4(3.25,5.1)
  silkscreen extent -9.45,-4.65 6.15,4.65, body extent -8.85,-6.3 8.85,6.35, height 0.25
"CAP TH ALPOLY D8.00mm S3.50mm H12.00mm" [mm] "8.00mm Diameter 12.00mm Lead Spacing Aluminum - Polymer Capacitors Radial, Can"
  oval 1.4x2.1 hole 0.8: 1(1.75,0) 2(-1.75,0)
  silkscreen extent -4,-4 4,4, body extent -4.01,-4 4,4, height 12
"CAP TH ALUM ELEC D5.00mm S2.00mm H11.00mm" [mm] "5mm Diameter 2mm Lead Spacing Aluminum Electrolytic Capacitors Radial, Can"
  oval 1.3x1.95 hole 0.8: 1(1,0) 2(-1,0)
  silkscreen extent -2.5,-2.5 2.5,2.5, body extent -2.51,-2.5 2.5,2.5, height 11
"CAP TH ALUM ELEC D10.00mm S5.00mm H17.00mm" [mm] "10mm Diameter 5mm Lead Spacing Aluminum Electrolytic Capacitors Radial, Can"
  oval 1.4x2.1 hole 0.8: 1(2.5,0) 2(-2.5,0)
  silkscreen extent -5,-5 5,5, body extent -5.01,-5 5,5, height 17
"CAP TH ALUM ELEC D10.00mm S5.00mm H21.00mm" [mm] "10mm Diameter 5mm Lead Spacing Aluminum Electrolytic Capacitors Radial, Can"
  oval 1.4x2.1 hole 0.8: 1(2.5,0) 2(-2.5,0)
  silkscreen extent -5,-5 5,5, body extent -5.01,-5 5,5, height 21
"CAP: 0805" [mm]
  rect 1x1.25 smd: 1(-1,0) 2(1,0)
  silkscreen extent -1.7,-0.83 1.7,0.83, body extent -1,-0.62 1,0.63, height 0.78
"CAP: 1206" [mm]
  rect 1x1.6 smd: 1(-1.5,0) 2(1.5,0)
  silkscreen extent -2.2,-1 2.2,1, body extent -1.6,-0.8 1.6,0.8, height 1
DO-219AD [mm] "SMAJ DO-214AC package"
  rect 2x1.1 smd: 1(-0.8,0)
  rect 0.8x0.8 smd: 2(1.1,0)
  silkscreen extent -2.8,-1 1.8,1.1, body extent -1.69,-0.65 1.42,0.65, height 0.83
DS1014-16S [mm] "BH2-10 pitch 2mm, 2x8"
  rect 1.3x1.3 hole 0.8: 1(0,0)
  round 1.3 hole 0.8: 2(0,2) 3(2,0) 4(2,2) 5(4,0) 6(4,2) 7(6,0) 8(6,2) 9(8,0) 10(8,2) 11(10,0) 12(10,2) 13(12,0) 14(12,2) 15(14,0) 16(14,2)
  silkscreen extent -4.55,-2.4 18.5,3.7, body extent -4.55,-1.7 18.55,3.7, height 5.7
DS1074-5MV [mm]
  rect 2.4x2.4 hole 1.8: 1(0,0)
  round 2.4 hole 1.8: 2(5.08,0) 3(10.16,0) 4(15.24,0) 5(20.32,0)
  silkscreen extent -2.54,-5.9 22.85,4.8, body extent -2.54,-5.9 22.86,4.87, height 3.66
Ekran [mm]
  body extent -5,-5 110,95, height 26.7
Lepestok [mm]
  body extent -3.99,-4 13.29,4, height 19.81
M4-10SCREW [mm]
  body extent -4,-4 4,4, height 17.1
NetTie [mm] "From(0805)"
  rect 1x1.25 smd: 1(0,0) 2(2,0)
  silkscreen extent -0.7,-0.83 2.7,0.83
OAR5 [mm]
  round 2.2 hole 1.5: 1(0,0) 2(20.32,0)
  silkscreen extent 2.54,-0.82 17.78,0.82, body extent -0.99,-1 21.31,1, height 22.4
OTV10 [mm]
  round 1.5 hole 1: 1(0,0)
SCREW-M2.5 [mm]
  body extent -2.5,-2.5 2.5,2.5, height 2.67
SIL051A7271L [mm]
  oval 1.4x1.303 hole 0.8: 1(0,0) 3(5.08,0) 5(10.16,0) 7(15.24,0)
  silkscreen extent -2.28,-2.54 17.52,2.54, body extent -2.33,-2.54 17.47,2.54, height 7.8
SOD-323 [mm]
  rect 1.085x0.55 smd: 1(-1.14,0) 2(1.14,0)
  silkscreen extent -2.2,-1 1.9,1, body extent -1.25,-0.63 1.25,0.63, height 1.15
SOD-323F [mm]
  rect 1.006x0.392 smd paste+0 mask+0: 1(-1,0)
  rrect100% 1.006x0.392 smd paste+0 mask+0: 2(1,0)
  silkscreen extent -1.46,-0.65 0.85,0.82, body extent -1.6,-0.73 1.6,0.73, height 0.25
SOT-23-3 [mm]
  rect 1.05x0.7 smd: 1(0,0) 2(0,-1.9) 3(2.3,-0.95)
  silkscreen extent -0.53,-2.41 1.43,0.6, body extent -0.05,-2.41 2.35,0.51, height 1.2
SOT-23-4 [mm]
  rect 1.8x0.9 smd: 1(0,0) 2(0,2.3) 3(0,4.6)
  rect 1.8x3.2 smd: 4(-6,2.3)
  silkscreen extent -4.75,-0.95 0.9,5.55, body extent -6.5,-0.95 0.5,5.55, height 1.65
SOT-23-5 [mm] "pitch 0.95 mm"
  rect 1.1x0.6 smd: 1(-1.3,0.95) 2(-1.3,0) 3(-1.3,-0.95) 4(1.3,-0.95) 5(1.3,0.95)
  round 0.5 on Mech1: ""(-1.1,1.1)
  silkscreen extent -1.9,-1.4 0.25,1.6, body extent -1.5,-1.5 1.5,1.5, height 1.3
STOYKA [mm]
  body extent -2.5,-2.89 2.5,2.89, height 26
"WASHER M4" [mm]
  body extent -4.5,-4.5 4.5,4.5, height 13.8
WASHER-M2.5 [mm]
  body extent -3.2,-3.2 3.2,3.2, height 0.5
WSL5931L5000FEA [mm]
  rect 5.2x8.75 smd: 1(-5.4,0) 2(5.4,0)
  silkscreen extent -8.6,-0.05 -8.5,0.05, body extent -7.5,-3.87 7.5,3.88, height 0.96
С2-29В-0,25(140.02.0204.00.00) [mm] "Резисторы постоянные непроволочные прецизионные С2-29В, производитель \"АО\"НПО\"ЭРКОН\""
  round 2.5 hole 1.5: 1(-8.75,0) 2(8.75,0)
  silkscreen extent -10.1,-2.25 10.1,2.25, body extent -9.15,-2.25 9.15,2.25, height 5.5
С2-29В-0,125(140.02.0202.00.00) [mm] "Резисторы постоянные непроволочные прецизионные С2-29В, производитель \"АО\"НПО\"ЭРКОН\""
  round 1.5 hole 0.8: 1(-6.25,0) 2(6.25,0)
  silkscreen extent -7.4,-1.75 7.4,1.75, body extent -6.55,-1.75 6.55,1.75, height 4.5
УШЯИ.685442.092vs2Rel [mm]
  round 3 hole 1.5 mask-10: 17(3,-9.5) 18(3,9.5) 19(45,-9.5) 20(45,9.5)
  silkscreen extent -2.3,-12.05 55,12, body extent -14.9,-9.75 62.9,9.75, height 24
УШЯИ.685631.123 [mm]
  round 8 hole 8 unplated: 0(0,0)
  body extent -7,-7 7,6.99, height 12.24

## Part data
DA1: "Very Low Supply Current / 3-Pin Microprocessor Reset / Monitors"
DA5 DA9: "30 V, High Speed, Low Noise, Low Bias / Current, JFET Operational Amplifier"
DA6 DA10: "LC2MOS Precision Quad SPST Switches"
DA7: "Single-Supply, Differential, 18-Bit ADC Driver"
DA8: "Rail-to-Rail I/O Amplifiers 2.7 V, 800 μA, 80 MHz"
DA15: "40V, High-Speed Comparators"
DA16 DA17 DA18: "TPS7A470x 36-V, 1-A, 4-µVRMS, RF LDO Voltage Regulator"
DA19: "TPS7A33 –36-V, 1-A, Ultralow-Noise Negative Voltage Regulator"
DD1: "Quad 2-Input NAND Gate High-Performance Silicon-Gate CMOS."
DD2 DD6: "Quad 2-Input AND Gate High-Performance Silicon-Gate CMOS"
DD3: "Decoder/Demultiplexer Dual 2-to-4"
DD4: "Дешифратор-демультиплексор IN74HC138A / 3-8 с инверсией на выходе"
DD5: "8-Bit SIPO Register w/ Latch & 3-State"
K1 K2 K3 K4 K5 K6 K7: "Relay or Contactor"
R1 R2 R3 R14: "Резисторы постоянные непроволочные прецизионные С2-29В, производитель \"АО\"НПО\"ЭРКОН\"\"АО\"НПО\"ЭРКОН\"", Категории качества=ВП, Ряд сопротивлений=Е192, ТУ="ОЖО.467.099 ТУ"
  R1: Диапазон значений номинальных сопротивлений="от 1 Ом до 5,11 МОм", Номинальная мощность рассеяния="0,25 Вт"
  R2 R3 R14: Диапазон значений номинальных сопротивлений="от 1 Ом до 1 МОм", Номинальная мощность рассеяния="0,125 Вт"
VD1 VD6 VD7 VD8 VD9 VD10 VD11 VD12 VD13 VD22 VD23 VD24 VD25: "Small Signal Fast Switching Diod"
VD2 VD3 VD4 VD5: "General Purpose Plastic Rectifier"
VD14 VD15 VD16 VD17 VD18 VD19 VD20 VD21: "Surface-Mount TMBS® (Trench MOS Barrier Schottky) Rectifier"
XP1: "pitch 2mm, 16 pin 2x8, straight"
XP2 XP3: "Connector"
R4 R5 R7 R8 R9 R10 R11 R12 R13 R15 R16 R17 R18 R19 R20 R21 R22 R29 R30 R31 R32 R33 R34 R35 R36 R37 R38 R39 R40 R41 R42 R43 R44 R45 R46 R47 R48 R53 R54 R55 R56 R57: ModelPrint=1206
R6: ModelPrint=0402
R23 R24 R25 R26 R27 R28 R49 R50 R51 R52: ModelPrint=0805
XP4: 1=~8, 2=~8, 3=GND, 4=~12, 5=~12

## Free pads (board coordinates)
  round 3 hole 3 unplated: 0(5,5) 0(5,16) 0(5,70.5) 0(5,110) 0(95,5) 0(95,110) 0(110,5) 0(110,110) 0(118,110) 0(125,110) 0(215,5) 0(215,110)
  round 3 hole 2: 0(17,44) 0(17,58.5)
  round 4 hole 4 unplated: 0(20,5) 0(200,5) 0(200,110)
  round 3 hole 3 unplated mask-25.4: 0(45,5)
  round 2.2 hole 1.5: 2(3,89.5) 2(3,95.25)
  round 1.2 hole 0.8: 2(30,57.792) 2(35.5,102.5)
  round 2.5 hole 1.5: 2(41.75,39.25) 2(42.6,108.05) 2(48.101,39.25) 2(48.25,108)
  round 1 smd mask+0.5: R1(1.75,105) R1(1.75,112.502) R1(2.498,9.75) R1(2.498,1.75) R1(9.75,112.502) R1(10,1.75) R1(210.25,2.498) R1(210.25,112.502) R1(218.25,2.498) R1(218.25,10) R1(218.25,105) R1(218.25,112.502)

## Via types
v1: diameter 0.8, hole 0.5, Top Layer, Top to Bottom Layer, Bottom, 151 vias
v2: diameter 1.2, hole 0.8, Top Layer, Top to Bottom Layer, Bottom, 20 vias
v3: diameter 1.5, hole 0.8, Top Layer, Top to Bottom Layer, Bottom, 18 vias
v4: diameter 1.8, hole 1, Top Layer, Top to Bottom Layer, Bottom, 10 vias
v5: diameter 1.4, hole 1, Top Layer, Top to Bottom Layer, Bottom, 9 vias
v6: diameter 1.4, hole 0.8, Top Layer, Top to Bottom Layer, Bottom, 7 vias

## Nets (pads, with @x,y where several pads share a name; then routed paths per layer and width w, separated by ;. In a path a pad name is that pad's centre, name@x,y a point inside that pad or via, vN(x,y) a via of type N, cw(c..) or ccw(c..) an arc to the next point about the centre after c; other vN are vias at no path point)
+4.096V: C9.2 DA4.6 DA8.3 KT4.1 R23.1 R24.1 R44.2 | length 108.6
  Top Layer, Top w0.254: R44.2@135.8,58.934 135.8,58.634 136.173,58.261 137.437,58.261 137.637,58.062 v1(137.785,58.062) ; v1(149.25,58.25) 150.676,56.824 176.339,56.824 v1(177.231,55.932) ; R23.1@162.903,92.042 165.128,92.042 166.009,92.923 167.965,92.923 178.534,82.355 178.534,70.302 177.634,70.302 ; DA8.3@170.696,74.072 173.083,74.072 173.991,73.164 173.991,70.689 175.215,70.689 175.602,70.302 177.634,70.302 ; C9.2@173.991,63.022 174.292,63.323 177.741,63.323 ; DA4.6@175.978,66.287 177.741,66.287 ; KT4.1@176,59.75 176.337,59.75 176.837,60.25 v1(177.784,60.25) 177.741,60.293 177.741,63.323 ; 177.634,70.302 177.741,70.195 177.741,66.287 ; 177.741,63.323 177.741,66.287
  Bottom Layer, Bottom w0.254: v1(137.785,58.062) 143.371,58.062 143.559,58.25 v1(149.25,58.25) ; v1(177.231,55.932) 177.231,58.765 177.784,59.318 v1(177.784,60.25)
+5.2V: C15.1 C22.1 C27.1 DA1.3 DA6.12 DA7.3 DA10.12 DA11.9 DA11.10 DA15.8 DD1.14 DD2.10 DD2.14 DD3.15 DD3.16 DD4.6 DD4.16 DD5.16 DD6.14 K1.5 K2.5 K3.5 K4.5 K5.5 K6.5 K7.5 NT2.2 R40.2 R55.1 XP1.1 XP1.7 | length 383.5
  Top Layer, Top w0.254: DA11.9@163.32,70.452 DA11.10@163.82,70.452 164.402,70.452 164.529,70.579 165.278,70.579 v1(165.31,70.611)
  Top Layer, Top w0.342: DA15.8@132.812,63.284 133.183,63.284 DA15.8@133.262,63.363
  Top Layer, Top w0.5: K1.5@69.1,94.33 73.92,94.33 ; K5.5@73.92,49.5 K4.5@73.92,57.75 K3.5@73.92,66 K2.5@73.92,74.25 K6.5@73.92,82.438 73.92,94.33 ; K7.5@84.75,94.42 81.179,94.42 81.089,94.33 73.92,94.33 ; DD4.16@102.863,78.878 103.052,78.878 103.122,78.809 103.122,77.582 v1(103.179,77.524) ; DD4.6@108.287,85.228 109.8,85.229 ; DD1.14@108.6,64.497 108.611,64.509 108.611,65.868 v1(109.994,67.25) ; DD2.10@108.6,71.199 108.619,71.218 109.597,71.218 109.79,71.411 v1(109.871,71.411) ; DD2.14@108.6,76.279 v1(108.6,77.438) ; v1(109.8,86.269) 109.8,85.229 ; DD3.15@111.488,86.498 DD3.16@111.488,85.229 109.8,85.229 ; DA1.3@114.2,60.55 114.343,60.55 114.443,60.65 114.443,64.693 v1(114.5,64.75) ; DD5.16@116.912,82.645 v1(119.356,82.645) 121.702,80.299 121.702,80.035 124.189,77.549 129.849,77.549 v1(129.9,77.6) ; v1(129.5,83.5) 129.5,88.707 129.793,89 130.248,89 130.386,88.862 130.967,88.862 v1(131.024,88.804) ; C27.1@129.912,66.709 129.912,66.409 131.57,64.75 v1(133,64.75) ; v1(131.2,42.5) 129.073,40.373 129.25,40.196 129.25,22.477 132.557,19.17 NT2.2@132.557,14.6 ; DA15.8@133.262,63.363 133.262,63.734 133.312,63.784 v1@133.312,64.512 ; DA10.12@133.924,93.768 133.924,91.624 135.049,90.5 v1(136,90.5) ; R55.1@134.812,69.009 135.062,68.759 135.362,68.759 135.612,68.509 v1(136.173,68.509) ; DA6.12@135.649,79.605 135.724,79.53 135.724,78.56 v1(136.092,78.192) ; XP1.1@139.3,104.7 140.4,103.6 144.2,103.6 ; v1(143.76,100.55) 143.76,103.16 144.2,103.6 ; XP1.7@145.3,104.7 144.2,103.6 ; v1(149.25,60) 149.331,60 149.419,59.912 DD6.14@151.835,59.912 ; v1(158.562,82.962) 160.52,82.962 160.92,82.562 161.22,82.562 161.32,82.462 C15.1@161.32,82.162 161.42,82.262 161.42,83.647 161.524,83.752 161.524,84.563 160.735,85.352 DA7.3@160.47,85.352
  Bottom Layer, Bottom w0.254: v1(165.31,70.611) v1@165.458,70.611
  Bottom Layer, Bottom w0.5: K2.5@73.92,74.25 73.92,74.326 76.344,76.75 102.741,76.75 103.122,77.13 103.122,77.467 v1(103.179,77.524) ; v1@103.179,77.438 v1(108.6,77.438) 108.954,77.792 ; 108.968,71.221 109.1,71.353 109.814,71.353 v1(109.871,71.411) ; v1(109.8,86.269) 108.65,85.119 108.65,82.884 108.921,82.613 ; v1(114.5,64.75) 112,67.25 v1(109.994,67.25) 109.994,68.535 109.504,69.024 109.478,69.024 108.921,69.581 108.921,82.613 ; v1@119.148,82.645 108.954,82.645 108.921,82.613 ; v1(129.5,83.5) 129.5,83.491 129.793,83.198 133.924,83.198 136.092,81.031 ; v1(129.9,77.6) 132.314,77.6 134.314,75.6 136.432,75.6 ; v1(131.024,88.804) 132.72,90.5 v1(136,90.5) 143.76,98.26 v1(143.76,100.55) ; v1(131.2,42.5) 131.2,56.847 134.312,59.959 ; v1(133,64.75) 133.081,64.75 133.492,64.339 133.962,64.339 134.312,63.989 ; v1(136.173,68.509) v1@136.254,68.509 ; v1(149.25,60) 145.175,60 145.048,60.127 134.48,60.127 134.312,59.959 ; C22.1@164.064,70.611 v1(165.31,70.611) ; v1@165.458,70.611 165.874,70.195 R40.2@167.118,70.195 ; R40.2@167.491,69.822 169.207,69.822 169.5,70.115 169.5,80.25 164.75,85 160.6,85 v1(158.562,82.962) 156.748,82.962 155.288,81.502 136.563,81.502 136.092,81.031 ; 134.312,59.959 134.312,63.605 134.55,63.843 134.55,63.989 135.107,64.545 136.432,65.871 136.432,75.6 ; 136.092,81.031 136.092,78.111 136.432,77.771 136.432,75.6
  other v4: 130.2,11.4 130.25,16.6
+8V: C4.1 C6.2 C7.1 C8.2 C11.2 C14.1 C23.1 C25.1 C31.2 DA2.8 DA3.5 DA4.2 DA5.7 DA8.7 DA9.7 DA12.5 DA13.8 DA14.5 DA17.13 DA17.15 DA17.16 NT1.2 VD2.1 VD4.1 VD23.1 | length 318.3
  Top Layer, Top w0.254: DA17.13@142.318,8.8 142.864,8.8 143.196,8.467 143.196,8.415 143.517,8.094 145.083,8.094 145.7,8.711 145.7,10.275
  Top Layer, Top w0.4: DA2.8@76.85,17.01 76.85,16.085 77.358,15.577 77.673,15.577 v1(77.75,15.5) 79.312,15.5 79.639,15.827 79.639,22.889 C6.2@79.75,23 ; VD2.1@93.837,18.764 95.128,18.764 95.456,18.435 v1(95.565,18.435) ; DA3.5@96.865,14.777 96.615,14.777 96.515,14.877 96.515,15.127 95.565,16.077 v1(95.565,18.435) ; VD4.1@97.485,18.666 95.903,18.666 95.673,18.435 v1(95.565,18.435) ; C25.1@127,53 128.188,53 128.688,52.5 v1(128.796,52.5) 128.72,52.576 128.72,54 127.862,54.859 DA14.5@127.612,54.859 ; v1(128.25,22.25) 128.25,41.05 v1(129.9,42.7) ; v1(131.221,22.25) 144.733,22.25 ; VD23.1@140.8,17.1 142.196,17.1 143,16.296 143,15.1 ; DA13.8@143.117,58.497 143.117,58.127 143.232,58.012 143.554,58.012 143.8,57.766 v1(143.8,51.1) ; v4(144.8,14.8) 144.8,22.183 144.733,22.25 ; v1(150.5,42.3) 151.45,42.3 152.5,41.25 152.5,22.484 152.266,22.25 144.733,22.25 ; v1(150.687,96.915) DA9.7@152.399,96.915 ; v1(150.75,50.75) 155.4,55.4 157.821,55.4 158.221,55 v1(160.75,55) ; v1(152.6,92.634) 152.6,86.625 151.182,85.207 151.182,83.231 151.961,82.452 151.981,82.472 154.914,82.472 v1(154.93,82.488) ; v1(153.25,71.5) 155.548,73.798 155.548,78.05 154.93,78.668 v1@154.93,82.472 ; DA12.5@158.2,98.45 158.45,98.45 159.173,99.173 159.173,99.3 v1(159.25,99.377) 159.25,100.663 159.443,100.857 159.693,100.857 C23.1@159.8,100.75 ; v1(161.25,60.25) 161.25,61.382 161,61.632 161,62.656 163.666,65.322 C7.1@163.991,65.322 164.316,65.322 165.616,66.622 C8.2@168.135,66.622 169.349,66.622 170.068,67.341 170.068,67.442 170.184,67.557 DA4.2@170.554,67.557 172.266,67.557 172.5,67.791 v1(172.5,71.133) ; C14.1@175.25,80 175.25,79.7 177.336,77.614 177.336,75.342 ; DA8.7@176.12,75.342 177.336,75.342 ; v1(176.882,71.25) 176.882,71.358 177.082,71.558 177.082,71.663 177.336,71.917 177.336,75.342
  Bottom Layer, Bottom w0.4: v1(77.75,15.5) 81.75,19.5 95.601,19.5 ; v1(95.565,18.435) 95.601,18.471 95.601,19.5 ; v1(128.796,52.5) 128.905,52.5 129.272,52.133 129.617,52.133 129.9,51.85 v1(129.9,42.7) ; v1(131.221,22.25) v1(128.25,22.25) 128.193,22.193 128.193,21.693 126,19.5 95.601,19.5 ; v1(143.8,51.1) 150.292,51.1 150.642,50.75 v1(150.75,50.75) 150.75,45.374 150.5,45.124 v1(150.5,42.3) ; v4(144.8,14.8) v4@144.8,14.9 ; v1(150.687,96.915) 150.687,94.548 v1(152.6,92.634) 160.384,92.634 161,93.25 161,97.627 v1(159.25,99.377) ; v1(153.25,71.5) 154.25,70.5 154.25,63 157.95,59.3 160.3,59.3 160.5,59.5 ; v1(160.75,55) 160.75,55.108 160.5,55.358 160.5,59.5 ; v1(161.25,60.25) 160.5,59.5 ; v1(172.5,71.133) 172.558,71.192 176.824,71.192 v1(176.882,71.25)
  other v4: 150,14.75 147.6,14.8
+12V: DA6.13 DA10.13 NT3.2 pad.2@35.5,102.5 VD1.1 | length 264.5
  Top Layer, Top w0.25: DA6.13@136.919,79.605 DA6.13@136.919,80.132
  Top Layer, Top w0.254: v1(20.25,78.25) 20.25,98.715 23.5,101.965 23.5,105.245 24.62,106.365 24.62,106.62 31,113 81.386,113 90.886,103.5 v1(120.731,103.5) ; v1(27,78.446) VD1.1@30.639,78.446 ; VD1.1@30.5,78.001 30.5,78.307 VD1.1@30.639,78.446 ; pad.2@35.5,102.5 34.391,102.5 32.25,100.359 32.25,80.057 VD1.1@30.639,78.446 ; v1(128,88.804) 128,82.25 v1(128.25,82) ; NT3.2@133,36.039 NT3.2@133,36.2 ; v1(133.964,81.4) 136.689,81.4 136.919,81.17 DA6.13@136.919,80.132 ; DA10.13@135.194,93.768 135.222,93.74 135.222,91.778 v1(135.25,91.75)
  Bottom Layer, Bottom w0.254: v1(20.25,78.25) 26.656,78.25 26.852,78.446 v1(27,78.446) ; v1(120.731,103.5) v1@126.297,103.5 ; v1(126.263,103.5) 128,101.763 v1(128,88.804) 129.702,88.804 132.446,91.549 135.049,91.549 v1(135.25,91.75) ; v1(128.25,82) 128.25,81.153 ; 131.2,39.9 131.1,39.9 129.073,41.927 129.073,50.655 127.2,52.528 127.2,52.63 126.373,53.457 126.373,59.173 128.25,61.05 128.25,81.153 ; v1(133.964,81.4) 128.497,81.4 128.25,81.153
  other v4: 131.5,33.7 131.5,36.5 131.55,38.9
-8V: C5.2 C6.1 C12.1 C24.2 C26.2 DA2.4 DA3.2 DA5.4 DA6.4 DA9.4 DA10.4 DA12.2 DA13.4 DA14.2 NT4.2 VD3.2 VD5.2 XP1.9 XP1.15 | length 272.4
  Top Layer, Top w0.4: 92.523,20.285 92.523,17.487 92.827,17.183 92.827,14.653 93.602,13.877
  Top Layer, Top w0.5: DA2.4@82.274,20.82 82.443,20.82 82.512,20.889 82.512,22.462 C6.1@82.75,22.7 ; C6.1@82.75,23 C6.1@82.75,22.7 ; C5.2@85.12,23.75 84.82,23.75 84.57,23.5 84.57,22.451 84.2,22.081 v1(84.2,22) 84.119,22 83.669,22.45 83,22.45 C6.1@82.75,22.7 ; 92.523,20.285 93.302,21.064 VD3.2@93.569,21.064 93.594,21.039 94.376,21.039 94.415,21 v1(95.565,21) 95.594,21.029 97.46,21.029 VD5.2@97.485,21.054 ; 93.602,13.877 94.215,13.877 DA3.2@94.265,13.827 ; DA14.2@130.212,55.809 130.262,55.759 130.96,55.759 132,54.719 132,54.3 132.05,54.25 132.25,54.25 C26.2@132.25,53.75 ; C26.2@132.45,54.25 134.3,52.4 v1(140.4,52.4) ; DA10.4@135.194,99.192 135.194,100.957 135.514,101.277 141.273,101.277 142.95,99.6 143.366,99.6 144.153,99.6 144.71,100.157 145.65,101.097 145.65,103.05 XP1.9@147.3,104.7 148.6,103.4 ; v1@136.919,83.27 DA6.4@136.919,85.029 ; DA13.4@139.307,63.921 139.307,67.739 140.318,68.75 v1(143.75,68.75) ; v1(144.754,74.446) 144.812,74.503 144.812,75.324 145.483,75.995 146.304,75.995 146.975,76.666 146.975,77.5 C12.1@147.225,77.75 ; v1(146.537,85.372) 145.645,84.481 145.645,80.804 146.537,79.912 DA5.4@146.975,79.912 146.975,78 C12.1@147.225,77.75 ; DA9.4@146.975,94.375 v1(148.931,94.375) 148.931,103.069 148.6,103.4 ; C12.1@147.5,77.75 C12.1@147.225,77.75 ; v1(150.889,24.361) 150.889,40.039 v1(151.1,40.25) ; XP1.15@153.3,104.7 153.3,103.4 ; DA12.2@155.6,97.5 155.65,97.55 156.263,97.55 156.86,98.147 156.86,102.463 155.923,103.4 153.3,103.4 ; 148.6,103.4 153.3,103.4
  Bottom Layer, Bottom w0.5: v1(84.2,22) 84.21,21.99 86.21,21.99 87.2,21 v1@95.635,21 ; v1(95.565,21) 98.926,24.361 v1(150.889,24.361) ; v1(137.148,83.198) 137.201,83.25 144.415,83.25 v1(146.537,85.372) 146.537,89.191 145.7,90.028 145.7,94.282 145.9,94.482 v1@148.931,94.482 ; v1(140.4,52.4) 140.457,52.343 140.67,52.343 140.712,52.3 150.25,52.3 ; v1(142.5,76.7) 142.5,74.708 ; v1(144.754,74.446) 142.762,74.446 142.5,74.708 ; v1(151.1,40.25) 152.4,41.55 152.4,52.3 150.25,52.3 ; 152.4,41.441 158.31,41.441 v4@158.318,41.449 ; 142.5,74.708 142.5,70 v1(143.75,68.75) 146.758,68.75 150.25,65.258 150.25,52.3
  other v4: 162.725,41.47 157.525,41.52
\K3: DD2.3 K4.3 | length 36.4
  Top Layer, Top w0.254: K4.3@79,57.75 80.131,56.619 93.958,56.619 100.25,62.911 100.25,71.75 102.239,73.739 DD2.3@102.7,73.739
\K4: pad.2@30,57.792 VD1.2 VT1.2 VT1.4 | length 18.4
  Top Layer, Top w0.254: pad.2@30,57.792 30,70.75 VT1.4@30.25,71 30.5,71.25 VD1.2@30.5,76
ADC_DRV_IN: DA12.1 KT10.1 R25.1 R41.2 | length 13.2
  Top Layer, Top w0.254: KT10.1@154.095,87.936 155.962,89.803 156.581,89.803 R25.1@156.82,90.042 ; DA12.1@155.35,98.45 155.177,98.277 154.988,98.277 154.669,97.958 154.669,96.092 154.947,95.815 154.947,94.423 R41.2@155.32,94.05 155.32,91.542 156.322,90.54 156.322,90.415 R25.1@156.695,90.042
AMP_IN: DA2.7 KT5.1 R12.2 R13.2 R15.2 R20.2 R22.1 | length 145.3
  Top Layer, Top w0.5: R15.2@74,16.5 R15.2@74.3,16.5 ; DA2.7@76.85,18.28 75.337,18.28 74.55,17.493 74.55,16.75 R15.2@74.3,16.5 ; KT5.1@81,11.5 80.919,11.581 80.919,13.75 ; R12.2@86.25,18.78 86.127,18.657 R13.2@86.127,16.217 R13.2@86.127,15.917 ; R20.2@139.765,73.492 140.065,73.492 140.557,73 148.3,73 ; R22.1@150.25,74.75 150.25,73.293 149.957,73 148.3,73 ; R15.2@74.3,16.5 74.55,16.25 74.55,15.45 76.25,13.75 80.919,13.75 ; 80.919,13.75 83.66,13.75 85.577,15.667 85.877,15.667 R13.2@86.127,15.917 ; R13.2@86.127,15.917 86.377,15.667 86.677,15.667 91.094,11.25 100.5,11.25 106.169,16.919 106.169,20.169 106.587,20.587 112.837,20.587 118.75,26.5 118.75,32.894 128.95,43.094 129.506,43.65 129.606,43.75 143.25,43.75 148.25,48.75 148.25,72.95 148.3,73
C: C3.2 FV2.2 K1.7 K2.7 K3.7 K6.7 pad.0@17,44 pad.2@41.75,39.25 pad.2@48.101,39.25 R1.2 R8.2 R9.2 R10.1 R11.1 | length 117.5
  Top Layer, Top w0.5: K3.7@68.84,66 K2.7@68.84,74.25 K6.7@68.84,82.438 68.84,88.99 K1.7@69.1,89.25
  Top Layer, Top w1.5: 16.75,39.75 17,40 ; pad.2@48.101,39.25 C3.2@59.25,39.25 63.089,39.25 63.45,39.611 ; 63.45,41 FV2.2@67.65,41 ; R1.2@65,31.72 65,31.814 63.567,33.247 63.567,37.4 R11.1@63.45,37.517 63.45,40.733 63.717,41 62.75,41.967 62.75,59.91 K3.7@68.84,66
  Top Layer, Top w3: 16.75,39.75 41.4,39.6 pad.2@41.75,39.25 42.5,40 47.351,40 pad.2@48.101,39.25 ; 17,40 pad.0@17,44
C': R16.2 VD2.2 VD3.1 VD7.2 VD12.1 XP2.1 XP2.2 | length 66.8
  Top Layer, Top w0.254: R16.2@88.868,18.707 88.969,18.807 90.111,18.807 90.264,18.655 90.767,18.655 90.84,18.582 91.022,18.764 VD2.2@91.289,18.764 VD3.1@91.289,21.064 91.289,22.207 91.832,22.75 110.46,22.75 112.21,24.5 XP2.1@112.21,27.25 ; XP2.2@110.5,27.25 XP2.1@112.21,27.25 ; XP2.1@113.04,27.25 XP2.1@112.21,27.25 ; VD7.2@135.5,48.302 135.5,48.609 135.431,48.678 134.546,48.678 134.048,49.176 VD12.1@133.1,49.176 133.081,49.157 133.081,48.581 112.395,27.895 112.21,27.71 XP2.1@112.21,27.25
CLK_ADI: DD6.1 DD6.2 XP1.12 | length 95.2
  Top Layer, Top w0.254: XP1.12@149.3,106.7 150.8,108.2 163.4,108.2 180,91.6 180,59.327 178.905,58.232 159.415,58.232 DD6.1@157.735,59.912 DD6.2@157.735,61.182
CLK_RgI: DD5.11 XP1.4 | length 52.2
  Top Layer, Top w0.254: DD5.11@116.912,76.295 116.474,76.295 114.304,78.466 114.304,94.089 127.892,107.677 140.323,107.677 XP1.4@141.3,106.7
DAT_ADI: DD6.6 XP1.10 | length 107.2
  Top Layer, Top w0.254: XP1.10@147.3,106.7 149.204,108.604 163.896,108.604 180.75,91.75 180.75,58.938 179.444,57.632 158.377,57.632 156.506,59.502 156.506,65.533 157.235,66.262 DD6.6@157.735,66.262
DAT_RgI: DD5.14 XP1.2 | length 45.2
  Top Layer, Top w0.254: DD5.14@116.912,80.105 116.475,80.105 114.708,81.871 114.708,93.922 127.886,107.1 138.628,107.1 139.028,106.7 XP1.2@139.3,106.7
DC1D1: DD3.2 DD5.15 | length 6.8
  Top Layer, Top w0.254: DD5.15@116.912,81.375 116.474,81.375 115.504,82.345 115.504,85.528 116.474,86.499 DD3.2@116.912,86.499
DC1D2: DD3.3 DD5.1 | length 12.1
  Top Layer, Top w0.254: DD5.1@111.488,82.645 111.75,82.645 111.948,82.843 111.948,83.448 v1(112.5,84) ; DD3.3@116.912,87.768 v1(119,87.768)
  Bottom Layer, Bottom w0.254: v1(112.5,84) 114.4,84 118.168,87.768 v1(119,87.768)
DC2D1: DD4.1 DD5.4 | length 3.2
  Top Layer, Top w0.254: DD4.1@108.287,78.878 108.308,78.857 111.466,78.857 DD5.4@111.488,78.835
DC2D2: DD4.2 DD5.3 | length 3.2
  Top Layer, Top w0.254: DD4.2@108.287,80.148 108.308,80.127 111.466,80.127 DD5.3@111.488,80.105
DC2D3: DD4.3 DD5.2 | length 3.2
  Top Layer, Top w0.254: DD4.3@108.287,81.418 108.308,81.397 111.466,81.397 DD5.2@111.488,81.375
ENB_RgI: DD1.1 XP1.6 | length 73.4
  Top Layer, Top w0.254: DD1.1@102.7,64.497 102.7,65.2 106.2,68.7 106.2,69.43 106.173,69.457 106.173,70.143 106.2,70.17 106.2,74.806 106.183,74.823 106.183,77.426 106.2,77.443 106.2,92.1 110.914,96.814 116.157,96.814 127.424,108.081 141.919,108.081 XP1.6@143.3,106.7